# Altium PCB TP3_PCB.PcbDoc
Units mm, origin at the board's own origin, x right, y up, seen from the top; angles counter-clockwise.
Board outline 41.1 x 48.6 mm, 2 copper layers (Top Layer, Bottom Layer); 36 components, 23 nets, 140 pads, 0 vias.
Unrouted connection lines stored in the file: 69.
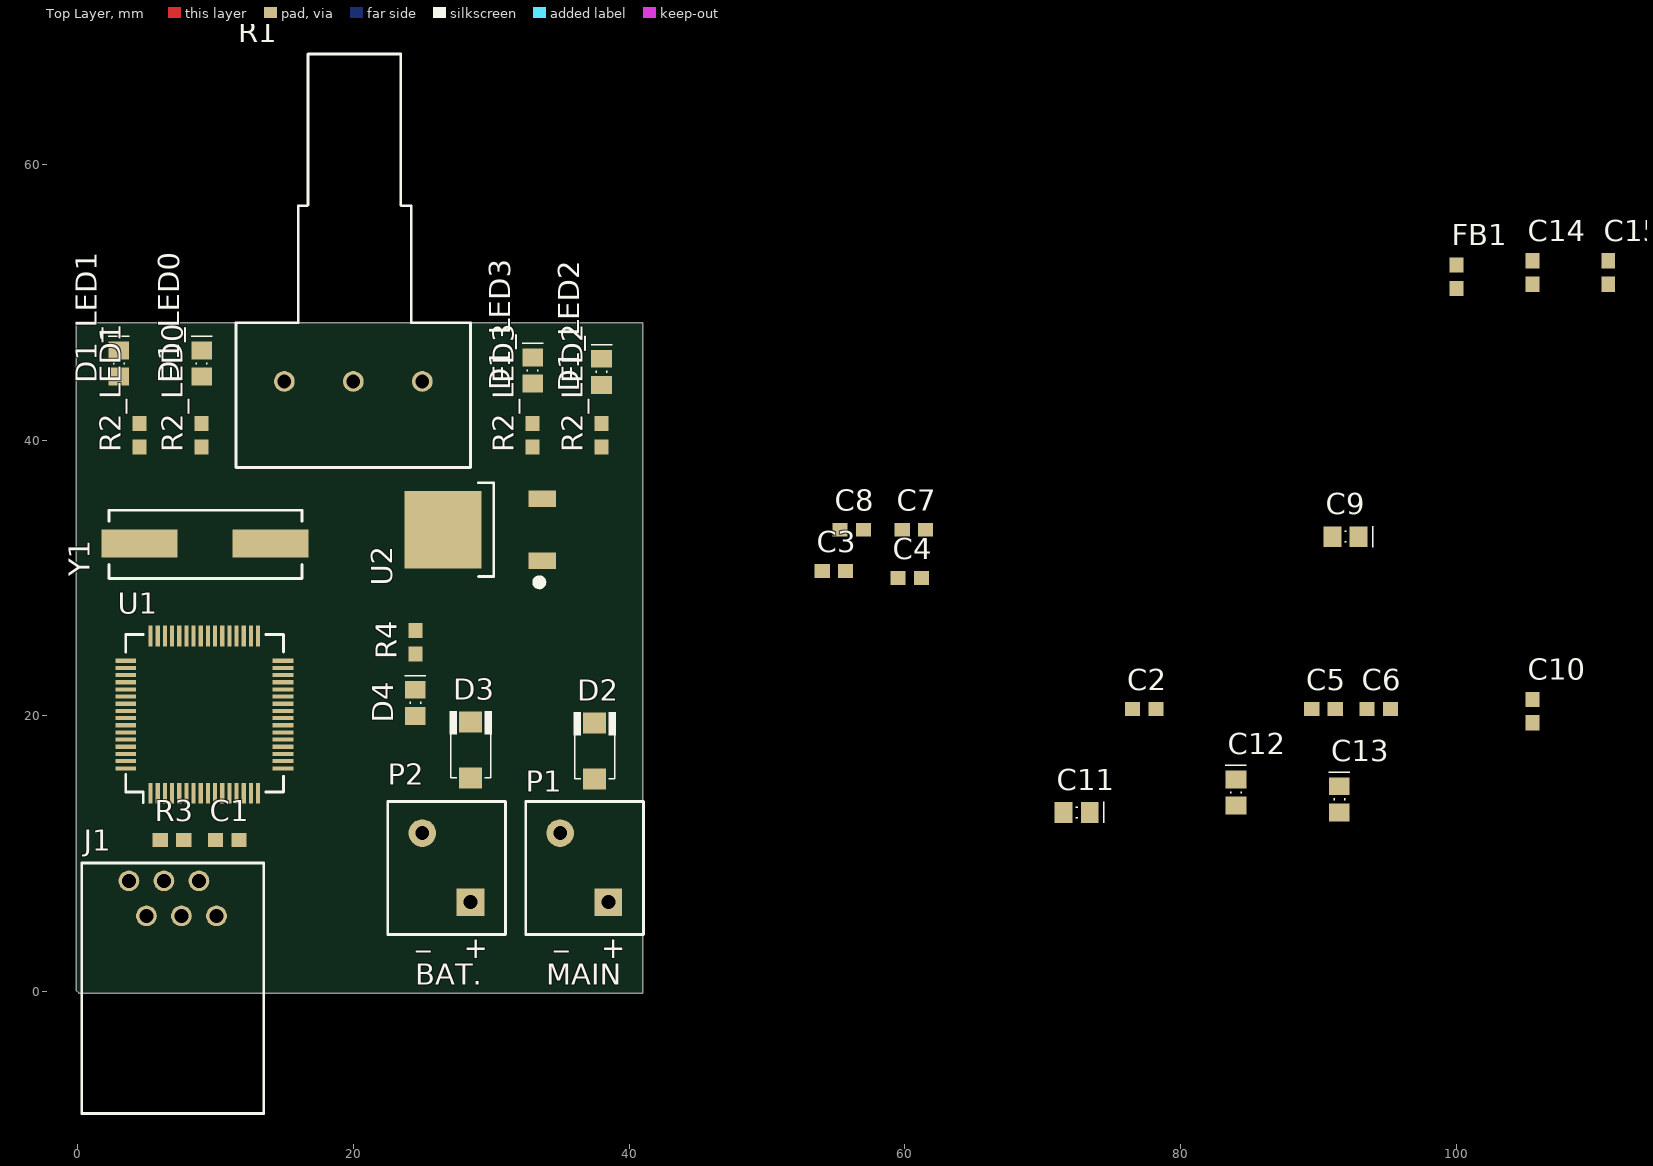
[diagram p0: Top Layer view]
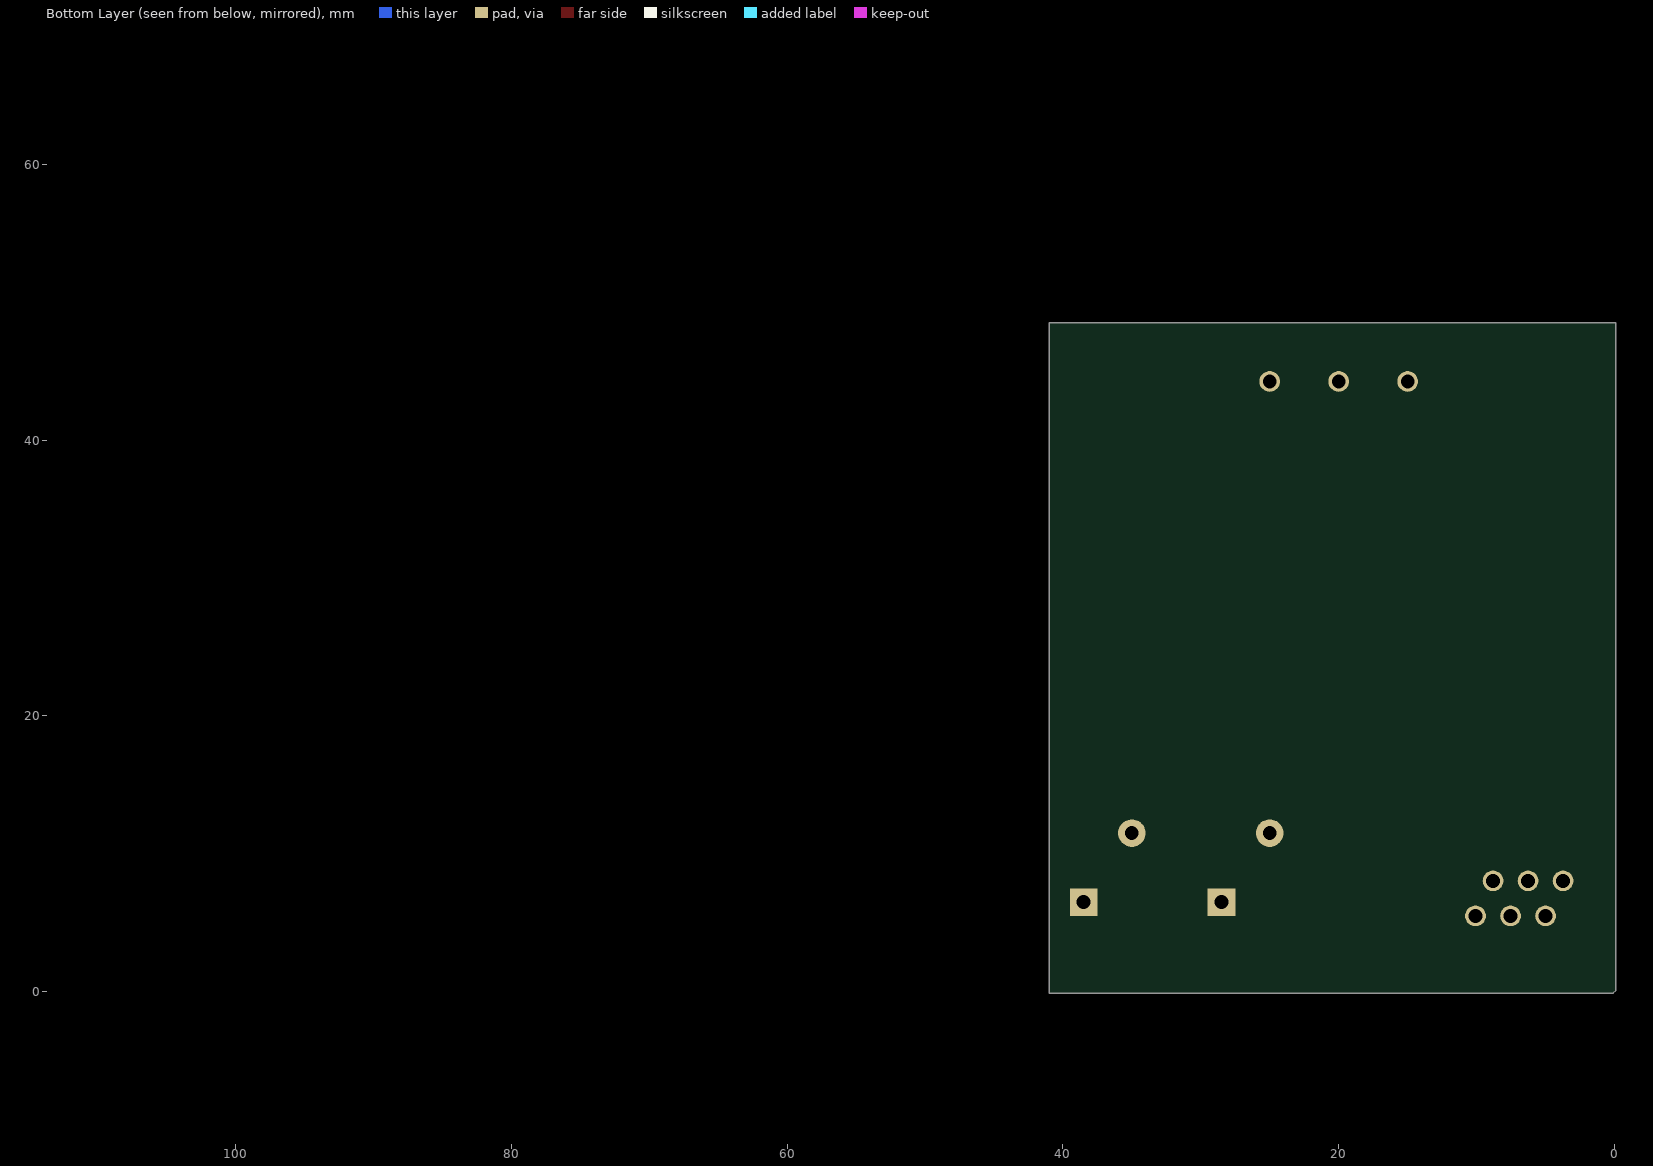
[diagram p1: Bottom Layer view, seen from below]

## Layer stack, top to bottom
Top Solder: solder mask 0.0102, Solder Resist, Dk 3.5
Top Layer: signal copper 0.0356
Dielectric 1: dielectric 0.32, FR-4, Dk 4.8
Bottom Layer: signal copper 0.0356
Bottom Solder: solder mask 0.0102, Solder Resist, Dk 3.5

## Board outline
0.1,-0.1 41,-0.1 41,48.5 -0.1,48.5 -0.1,0.1

## Design rules (kind name [scope] priority, off if disabled: settings)
Clearance [All] p1: gap=0.2
HoleSize [All] p1: absolutevalues=TRUE maxlimit=3 minlimit=0.3 maxpercent=80.000 minpercent=20.000
PolygonConnect [All] p1: connectstyle=Relief reliefconductorwidth=0.254 reliefentries=4 polygonreliefangle="90 Angle" airgapwidth=0.254
RoutingVias [All] p1: holewidth=1 width=1 viastyle="Through Hole" minholewidth=0.3 minwidth=0.7 maxholewidth=3 maxwidth=3
SolderMaskExpansion [All] p1: expansion=0.102
UnpouredPolygon [All] p1: allowunpoured=FALSE
Width [All] p1: maxlimit=3 minlimit=0.2 preferedwidth=0.25
28 further rules are at their usual default settings.

## Classes and differential pairs
channel class led: LED0 LED1 LED2 LED3
component class TP2: R1
component class POWER: C11 C12 C13 C14 C15 D2 D3 D4 FB1 P1 P2 R4 U2
component class PIC: C1 C2 C3 C4 C5 C6 C7 C8 C9 C10 J1 R3 U1 Y1
component class LED3: D1_LED3 R2_LED3
component class LED2: D1_LED2 R2_LED2
component class LED1: D1_LED1 R2_LED1
component class LED0: D1_LED0 R2_LED0

## Components (designator, comment, footprint, x,y, rotation, side; value= is the part's Value field where it differs from the comment)
C1 "100nF" CAPC1608N 10,11 r0 top
C2 "100nF" CAPC1608N 76.5,20.5 r0 top
C3 "100nF" CAPC1608N 54,30.5 r0 top
C4 "100nF" CAPC1608N 59.5,30 r0 top
C5 "100nF" CAPC1608N 89.5,20.5 r0 top
C6 "100nF" CAPC1608N 93.5,20.5 r0 top
C7 "20pF" CAPC1608N 59.8,33.5 r0 top
C8 "20pF" CAPC1608N 55.3,33.5 r0 top
C9 "10uF 6.3V" CAPC2012N 91,33 r0 top
C10 "1uF 6.3V" CAPC1608N 105.5,19.5 r90 top
C11 "10uF 6.3V" CAPC2012N 71.5,13 r0 top
C12 "10uF 6.3V" CAPC2012N 84,13.5 r90 top
C13 "10uF 6.3V" CAPC2012N 91.5,13 r90 top
C14 "1uF 6.3V" CAPC1608N 105.5,51.3 r90 top
C15 "100nF" CAPC1608N 111,51.3 r90 top
D1_LED0 "Green LED" "LED 0805" 9,44.6 r90 top (schematic designator D1)
D1_LED1 "Green LED" "LED 0805" 3,44.6 r90 top (schematic designator D1)
D1_LED2 "Green LED" "LED 0805" 38,44 r90 top (schematic designator D1)
D1_LED3 "Green LED" "LED 0805" 33,44.1 r90 top (schematic designator D1)
D2 "GF1A" SMA/DO-214AC_21 37.5,15.44 r90 top
D3 "GF1A" SMA/DO-214AC_21 28.5,15.5 r90 top
D4 "Green LED" "LED 0805" 24.5,20 r90 top
FB1 "600r" INDC1608AN 100,51 r90 top
J1 "Program / Debug" RJ12_90 5,5.5 r0 top
P1 "12V Main" PHOENIX_1985195 38.5,6.5 r0 top
P2 "12V Battery" PHOENIX_1985195 28.5,6.5 r0 top
R1 "1K" PDB181-K415K-102A2 11.5,37 r0 top
R2_LED0 "330r" RESC1608N 9,39.5 r90 top (schematic designator R2)
R2_LED1 "330r" RESC1608N 4.5,39.5 r90 top (schematic designator R2)
R2_LED2 "330r" RESC1608N 38,39.5 r90 top (schematic designator R2)
R2_LED3 "330r" RESC1608N 33,39.5 r90 top (schematic designator R2)
R3 "4.7k" RESC1608N 6,11 r0 top
R4 "470r" RESC1608N 24.5,24.5 r90 top
U1 "PIC32MX764F128H-I/PT" QFP50P1200X1200X120-64 3.5,24 r0 top
U2 "AP1117" TD03B_N 26.5,33.5 r90 top
Y1 "8MHz" "HC49/4H SMX CRYSTAL" 14,32.5 r180 top

## Footprints (in the part's own frame and the unit in brackets; to place one, negate y for a bottom-side part, rotate by r counter-clockwise, add the part's x,y. Pads: shape width x height; smd on the part's side, far side on the other; paste and mask are expansions set on the pad)
CAPC1608N [mm]
  rect 1.1x1 smd: 1(0,0) 2(1.7,0)
CAPC2012N [mm]
  rect 1.3x1.5 smd: 1(0,0) 2(1.9,0)
  silkscreen extent 0.89,-0.76 2.92,0.76
"HC49/4H SMX CRYSTAL" [mm]
  rect 5.5x2 smd: 1(0,0) 2(9.5,0)
  silkscreen extent -2.29,-2.41 11.71,2.54
INDC1608AN [mm]
  rect 1.1x1 smd: 1(0,0) 2(1.7,0)
"LED 0805" [mm]
  rect 1.3x1.5 smd: 1(0,0) 2(1.9,0)
  silkscreen extent 0.89,-0.76 2.92,0.76
PDB181-K415K-102A2 [mm]
  round 1.5 hole 1: 1(3.5,7.25) 2(8.5,7.25) 3(13.5,7.25)
  silkscreen extent 0,1.02 17,30.99
PHOENIX_1985195 [mm]
  rect 2x2 hole 1: 1(0,0)
  round 2 hole 1: 2(-3.5,5)
  silkscreen extent -6,-2.35 2.54,7.3
QFP50P1200X1200X120-64 [mm]
  rect 0.3x1.5 smd: 1(1.8,-9.6) 2(2.32,-9.6) 3(2.84,-9.6) 4(3.36,-9.6) 5(3.88,-9.6) 6(4.4,-9.6) 7(4.92,-9.6) 8(5.44,-9.6) 9(5.96,-9.6) 10(6.48,-9.6) 11(7,-9.6) 12(7.52,-9.6) 13(8.04,-9.6) 14(8.56,-9.6) 15(9.08,-9.6) 16(9.6,-9.6) 33(9.6,1.8) 34(9.08,1.8) 35(8.56,1.8) 36(8.04,1.8) 37(7.52,1.8) 38(7,1.8) 39(6.48,1.8) 40(5.96,1.8) 41(5.44,1.8) 42(4.92,1.8) 43(4.4,1.8) 44(3.88,1.8) 45(3.36,1.8) 46(2.84,1.8) 47(2.32,1.8) 48(1.8,1.8)
  rect 1.5x0.3 smd: 17(11.4,-7.8) 18(11.4,-7.28) 19(11.4,-6.76) 20(11.4,-6.24) 21(11.4,-5.72) 22(11.4,-5.2) 23(11.4,-4.68) 24(11.4,-4.16) 25(11.4,-3.64) 26(11.4,-3.12) 27(11.4,-2.6) 28(11.4,-2.08) 29(11.4,-1.56) 30(11.4,-1.04) 31(11.4,-0.52) 32(11.4,0) 49(0,0) 50(0,-0.52) 51(0,-1.04) 52(0,-1.56) 53(0,-2.08) 54(0,-2.6) 55(0,-3.12) 56(0,-3.64) 57(0,-4.16) 58(0,-4.68) 59(0,-5.2) 60(0,-5.72) 61(0,-6.24) 62(0,-6.76) 63(0,-7.28) 64(0,-7.8)
  silkscreen extent 0,-10.29 11.43,1.91
RESC1608N [mm]
  rect 1.1x1 smd: 1(0,0) 2(1.7,0)
RJ12_90 [mm]
  round 1.5 hole 1: 1(-1.27,2.54) 2(0,0) 3(1.27,2.54) 4(2.54,0) 5(3.81,2.54) 6(5.08,0)
  silkscreen extent -4.7,-14.32 8.51,3.84
SMA/DO-214AC_21 [mm]
  rect 1.52x1.68 smd: 1(0,0) 2(4.06,0)
  silkscreen extent 0,-1.52 4.83,1.52
TD03B_N [mm]
  rect 1.2x2 smd: 1(2.25,-7.2) 3(-2.25,-7.2)
  rect 5.6x5.6 smd: 4(0,0)
  silkscreen extent -4.19,-7.37 3.4,-2.57

## Part data
C1 C2 C3 C4 C5 C6 C7 C8 C9 C10 C11 C12 C13 C14 C15: library part Cap, "Capacitor"
D1_LED0 D1_LED1 D1_LED2 D1_LED3 D4: library part LED0, "Typical INFRARED GaAs LED"
D2 D3: library part Diode, "Default Diode"
FB1: library part Inductor, "Inductor"
J1: library part "Header 6", "Header, 6-Pin"
P1 P2: library part "Header 2", "Header, 2-Pin"
R1: library part "RPot SM", "Potentiometer"
R2_LED0 R2_LED1 R2_LED2 R2_LED3 R3 R4: library part Res1, "Resistor"
U1: "PIC32MX764F128H"
U2: "1A LDO, 18V input, DPAK"
Y1: library part XTAL, "Crystal Oscillator"

## Nets (pads, with @x,y where several pads share a name; then routed paths per layer and width w, separated by ;. In a path a pad name is that pad's centre, name@x,y a point inside that pad or via, vN(x,y) a via of type N, cw(c..) or ccw(c..) an arc to the next point about the centre after c; other vN are vias at no path point)
ALIM: D2.1 P1.1
BATTERY: D3.1 P2.1
GND: C1.1 C2.1 C3.1 C4.1 C5.1 C6.1 C7.1 C8.1 C9.1 C10.1 C11.1 C12.2 C13.2 C14.1 C15.1 D1_LED0.2 D1_LED1.2 D1_LED2.2 D1_LED3.2 D4.2 J1.3 P1.2 P2.2 U1.9 U1.20 U1.25 U1.41 U2.1
LED0: U1.46
LED1: U1.49
LED2: U1.50
LED3: U1.51
MCLR: J1.1 R3.1 U1.7
NetC9_2: C9.2 C10.2 U1.56
NetD1_LED0_1: D1_LED0.1 R2_LED0.1
NetD1_LED1_1: D1_LED1.1 R2_LED1.1
NetD1_LED2_1: D1_LED2.1 R2_LED2.1
NetD1_LED3_1: D1_LED3.1 R2_LED3.1
NetD4_1: D4.1 R4.1
NetR1_2: R1.2 U1.14
PGC: J1.5 U1.15
PGD: J1.4 U1.16
V3P3: C1.2 C2.2 C3.2 C4.2 C5.2 C13.1 C14.2 FB1.1 J1.2 R3.2 U1.10 U1.26 U1.35 U1.38 U1.57 U2.4
V3P3A: C6.2 C15.2 FB1.2 R1.1 U1.19
V5: C11.2 C12.1 D2.2 D3.2 R4.2 U2.3
VCC: R1.3
X1: C7.2 U1.39 Y1.2
X2: C8.2 U1.40 Y1.1
pads on no net: J1.6 R2_LED0.2 R2_LED1.2 R2_LED2.2 R2_LED3.2 U1.1 U1.2 U1.3 U1.4 U1.5 U1.6 U1.8 U1.11 U1.12 U1.13 U1.17 U1.18 U1.21 U1.22 U1.23 U1.24 U1.27 U1.28 U1.29 U1.30 U1.31 U1.32 U1.33 U1.34 U1.36 U1.37 U1.42 U1.43 U1.44 U1.45 U1.47 U1.48 U1.52 U1.53 U1.54 U1.55 U1.58 U1.59 U1.60 U1.61 U1.62 U1.63 U1.64

## Silkscreen, mask and mechanical layers (free items; w line width, h text height)
Top Overlay:
  text "BAT." at 24.5,0.5 h1.52
  text "MAIN" at 34,0.5 h1.52

## Text inside footprints (layer, text, board x,y; h text height)
P1: Top Overlay "+" at 37.992,2.436 h1.52; Top Overlay "_" at 34.563,3.325 h1.52
P2: Top Overlay "+" at 27.992,2.436 h1.52; Top Overlay "_" at 24.563,3.325 h1.52